# Altium PCB PCB.PcbDoc
Units mm, origin at the board's own origin, x right, y up, seen from the top; angles counter-clockwise.
Board outline 26.67 x 49.53 mm, 2 copper layers (Top Layer, Bottom Layer), stack 1.271 mm thick; 65 components, 45 nets, 214 pads, 69 vias.
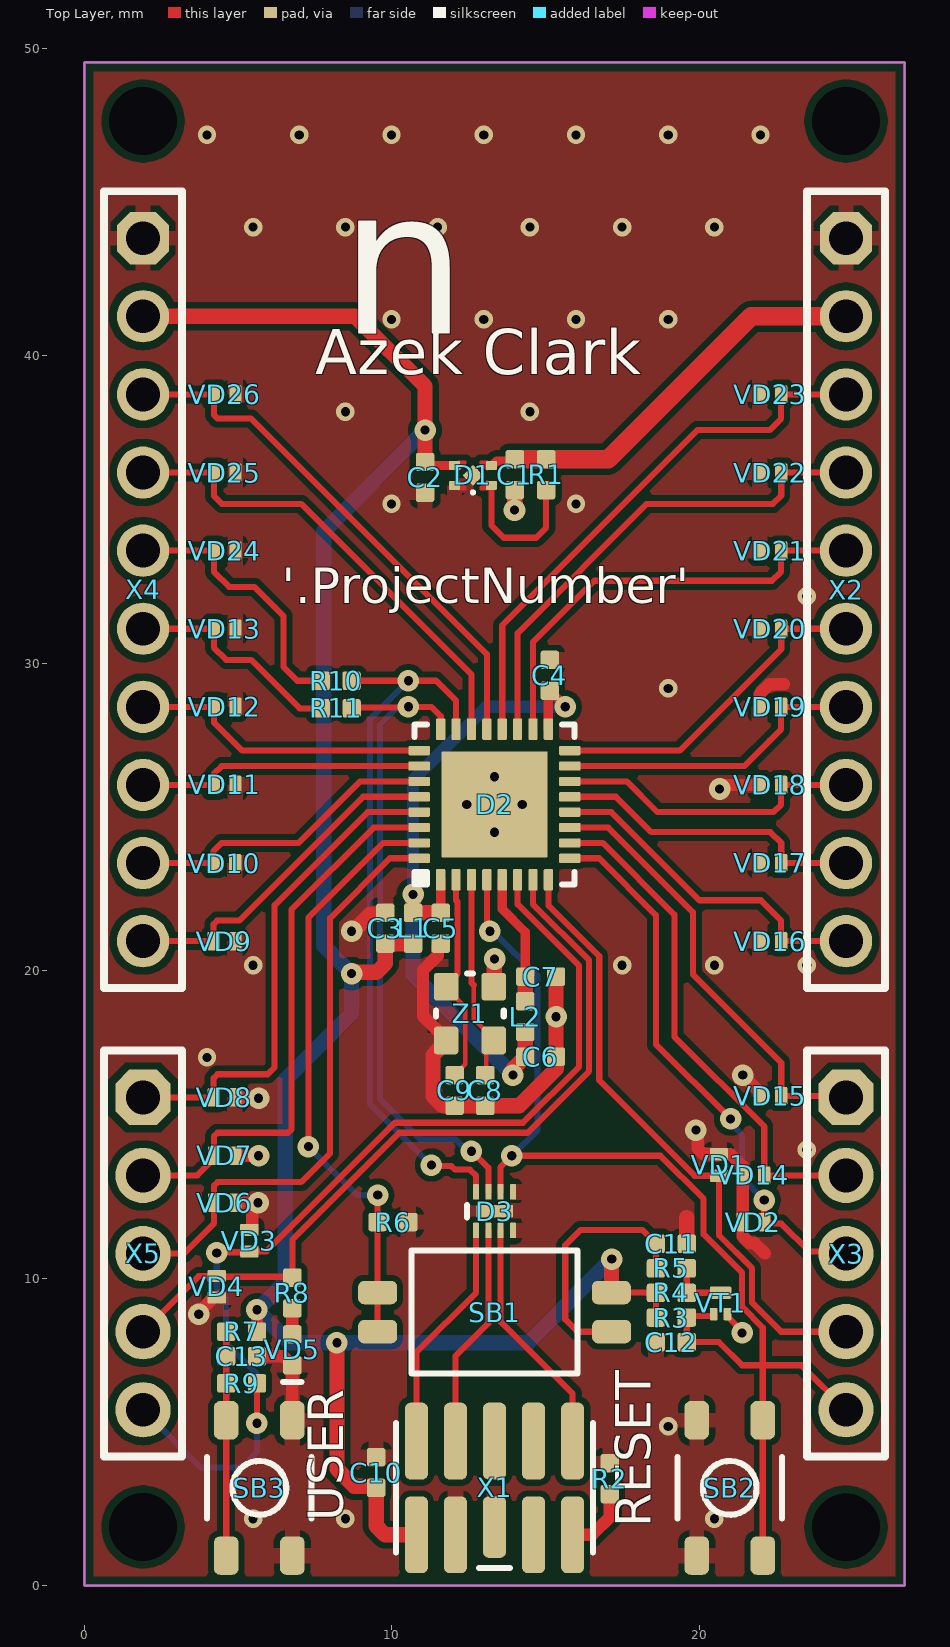
[diagram p0: Top Layer view]
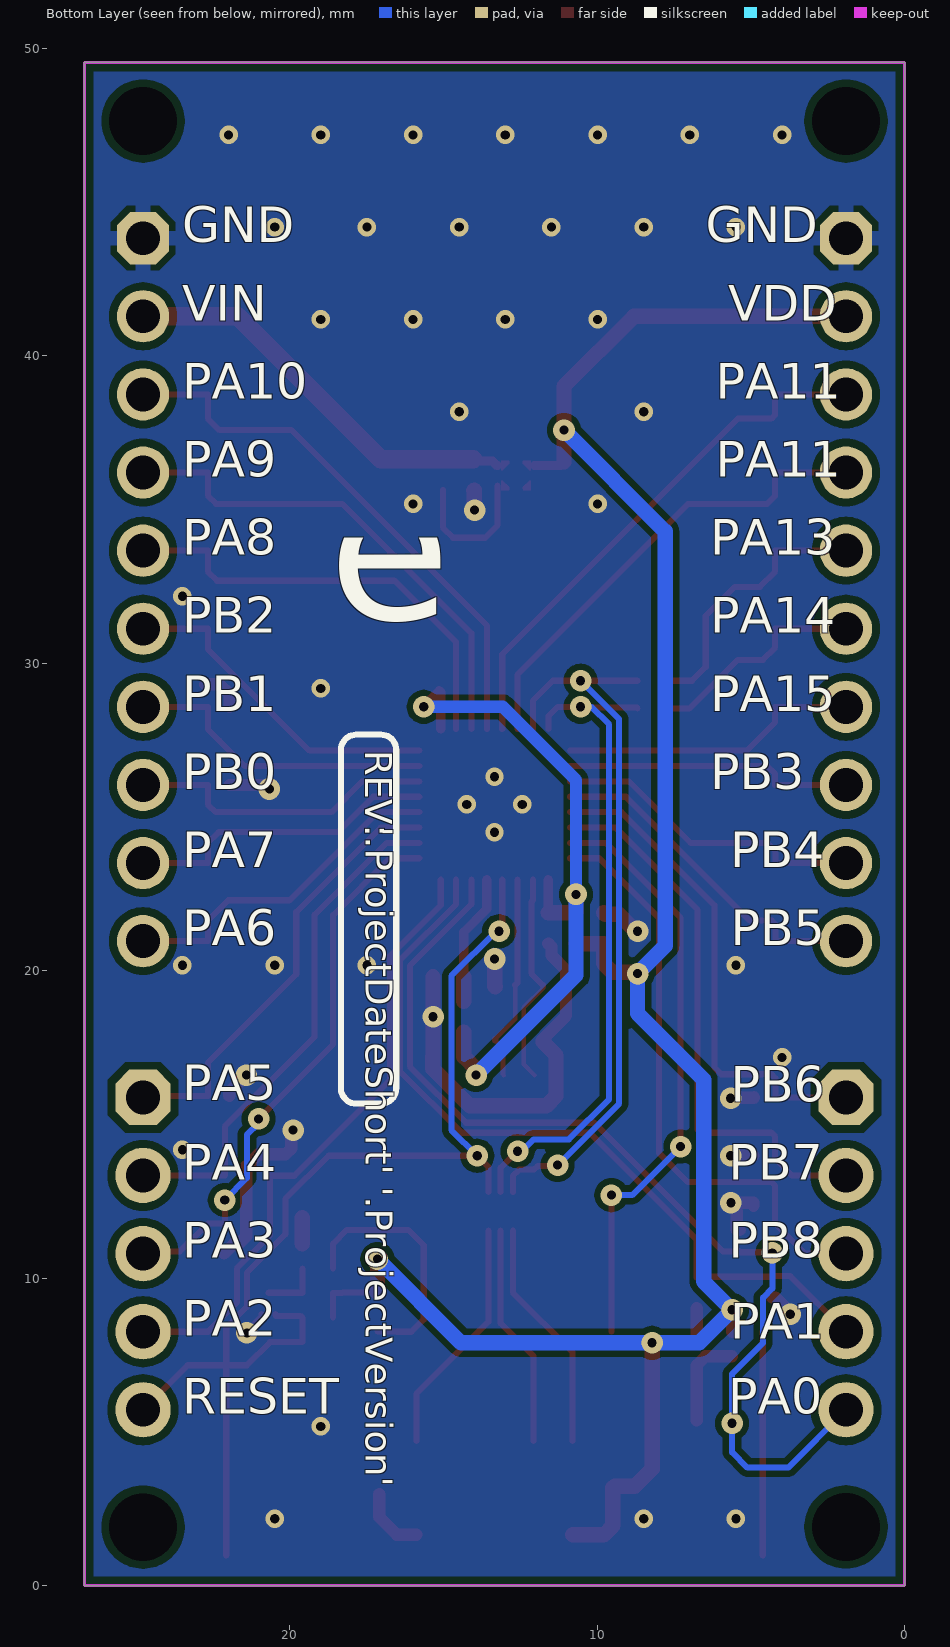
[diagram p1: Bottom Layer view, seen from below]
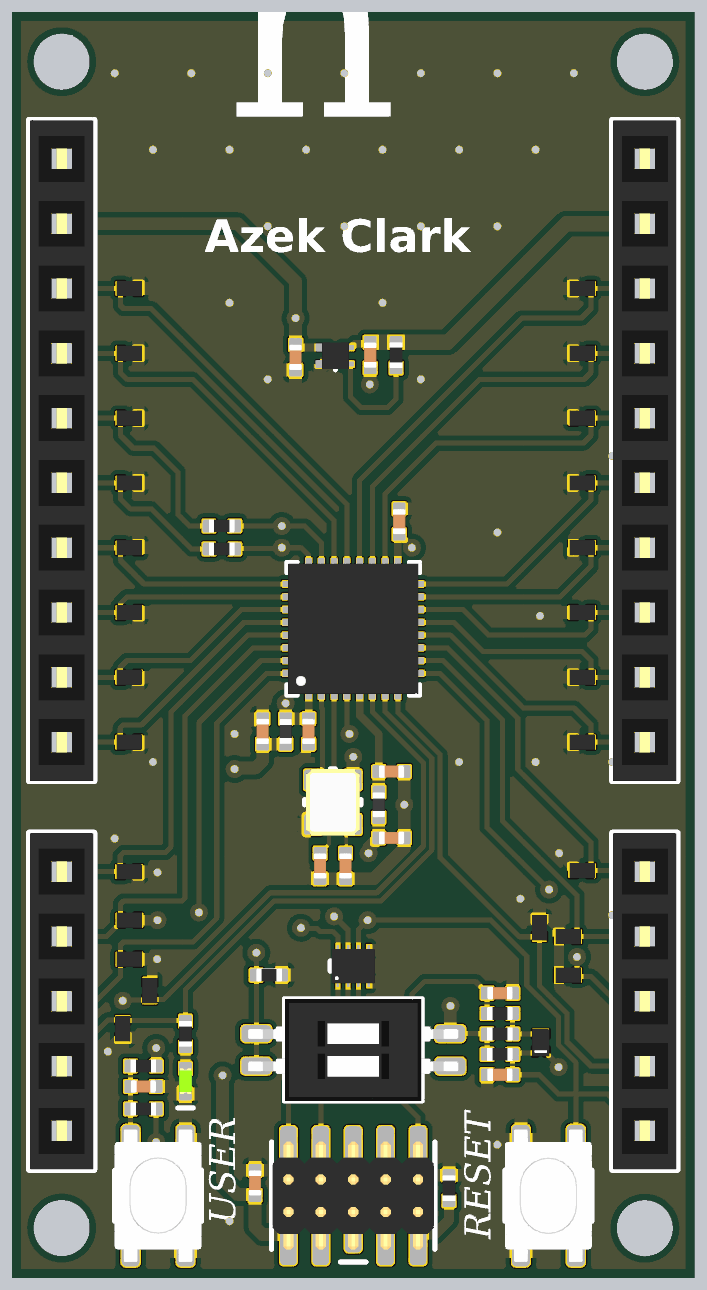
[diagram p2: 3D render of the assembled board from above, using the file's embedded part models]

## Layer stack, top to bottom
Top Solder: solder mask 0.0102, Solder Resist, Dk 3.5
Top Layer: signal copper 0.0356
Dielectric 1: dielectric 1.2, FR-4, Dk 4.8
Bottom Layer: signal copper 0.0356
Bottom Solder: solder mask 0.0102, Solder Resist, Dk 3.5

## Board outline
0,0 0,49.53 26.67,49.53 26.67,0

## Design rules (kind name [scope] priority, off if disabled: settings)
AcuteAngle [All] p1: minimum=4.50000000000000E+0001 checktracksonly=TRUE
BoardOutlineClearance [All] p1: gap=0.3 ignorepadtopadclearanceinfootprint=FALSE
Clearance Clearance_NPTH [All vs InPadClass('NPTH')] p1: gap=0.4 ignorepadtopadclearanceinfootprint=FALSE except(0: Arc-Hole Track-Hole SMDPad-Hole THPad-Hole Via-Hole Fill-Hole Poly-Hole Region-Hole Text-Hole)
Clearance Clearance_MultiLayerPad [OnLayer('Multi-Layer') and IsPad] p2: gap=0.25 ignorepadtopadclearanceinfootprint=FALSE except(0: Arc-Hole Track-Hole SMDPad-Hole THPad-Hole Via-Hole Fill-Hole Poly-Hole Region-Hole Text-Hole)
Clearance Clearance_Polygon [InPolygon] p3: gap=0.2 ignorepadtopadclearanceinfootprint=FALSE except(0: Arc-Hole Track-Hole SMDPad-Hole THPad-Hole Via-Hole Fill-Hole Poly-Hole Region-Hole Text-Hole)
Clearance [All] p4: gap=0.15 ignorepadtopadclearanceinfootprint=FALSE except(0: Arc-Hole Track-Hole SMDPad-Hole THPad-Hole Via-Hole Fill-Hole Poly-Hole Region-Hole Text-Hole; 0.127: Arc-Arc Arc-Track Track-Track)
ComponentClearance [All] p1: gap=0.254 collisioncheckmode=3 verticalgap=0.2 showdistances=FALSE
DiffPairsRouting [All] p1: maxlimit=0.254 minlimit=0.2 mostfreqgap=0.254 toplayer_minwidth=0.2 toplayer_maxwidth=0.5 toplayer_prefwidth=0.3 bottomlayer_minwidth=0.2 bottomlayer_maxwidth=0.5 bottomlayer_prefwidth=0.3 maxuncoupledlength=12.7
Height [All] p1: minheight=0 maxheight=60 prefheight=12.7
HoleSize [All] p1: absolutevalues=TRUE maxlimit=6.3 minlimit=0.3 maxpercent=80.000 minpercent=20.000
HoleToHoleClearance [All] p1: gap=0.5 allowstackedmicrovias=TRUE
MinimumAnnularRing [All] p1: minimumring=0.13
MinimumSolderMaskSliver [All] p1: minsoldermaskwidth=0.05
PasteMaskExpansion [All] p1: expansion=-0.05
PlaneClearance [All] p1: clearance=0.5
PlaneConnect [All] p1: planeconnectstyle=Relief reliefexpansion=0.5 reliefentries=4 reliefconductorwidth=0.3 reliefairgap=0.2
PolygonConnect PolygonConnect_PowerPAD [All vs InPadClass('PowerPAD')] p1: connectstyle=Relief reliefconductorwidth=1 reliefentries=4 polygonreliefangle="90 Angle" airgapwidth=0.3
PolygonConnect PolygonConnect_PadGND [InNet('GND') and IsPad] p2: connectstyle=Relief reliefconductorwidth=0.5 reliefentries=4 polygonreliefangle="90 Angle" airgapwidth=0.2
PolygonConnect PolygonConnect_Via [IsVia] p3: connectstyle=Direct reliefconductorwidth=0.254 reliefentries=4 polygonreliefangle="90 Angle" airgapwidth=0.254
PolygonConnect [All] p4: connectstyle=Relief reliefconductorwidth=0.6 reliefentries=4 polygonreliefangle="90 Angle" airgapwidth=0.3
RoomDefinition GPIO-Debug [InComponentClass('GPIO-Debug')] p1: confinementstyle=ConfineIn formatcopy=TRUE lockcomponents=FALSE outline 9.289,27.921 7.081,27.921 7.081,30.029 9.289,30.029
RoomDefinition LED&Button [InComponentClass('LED&Button')] p2: confinementstyle=ConfineIn formatcopy=TRUE lockcomponents=FALSE outline 3.631,0.046 3.631,6.304 4.006,6.304 4.006,8.859 6.156,8.859 6.156,10.619 7.364,10.619 7.364,8.769 7.414,8.769 7.414,6.304 7.739,6.304 7.739,0.046
RoomDefinition MCU-Power [InComponentClass('MCU-Power')] p3: confinementstyle=ConfineIn formatcopy=TRUE lockcomponents=FALSE outline 13.639,14.996 11.431,14.996 11.431,16.971 11.056,16.971 11.056,20.396 9.431,20.396 9.431,22.604 10.231,22.604 10.231,28.504 14.531,28.504 14.531,30.704 15.739,30.704 15.739,28.504 16.439,28.504 16.439,22.296 15.939,22.296 15.939,16.596 13.639,16.596
RoomDefinition PowerSupply [InComponentClass('PowerSupply')] p4: confinementstyle=ConfineIn formatcopy=TRUE lockcomponents=FALSE outline 10.472,34.933 10.472,37.141 14.601,37.141 14.601,37.133 15.617,37.133 15.617,34.925 14.409,34.925 14.409,34.933
RoomDefinition MCU-Debug [InComponentClass('MCU-Debug')] p5: confinementstyle=ConfineIn formatcopy=TRUE lockcomponents=FALSE outline 8.596,6.536 8.596,11.244 8.931,11.244 8.931,12.425 12.081,12.425 12.081,13.625 14.489,13.625 14.489,11.719 20.189,11.719 20.189,10.129 21.439,10.129 21.439,6.304 23.039,6.304 23.039,0.046 18.931,0.046 18.931,0.097 9.781,0.097 9.781,2.571 8.881,2.571 8.881,6.536
RoomDefinition Connector-side-2 [InComponentClass('Connector-side-2')] p6: confinementstyle=ConfineIn formatcopy=TRUE lockcomponents=FALSE outline 0.185,3.775 5.985,3.775 5.985,45.775 0.185,45.775
RoomDefinition Connector-side-1 [InComponentClass('Connector-side-1')] p7: confinementstyle=ConfineIn formatcopy=TRUE lockcomponents=FALSE outline 20.031,12.821 20.031,14.529 21.452,14.529 21.452,39.339 23.114,39.339 23.114,45.72 26.416,45.72 26.416,17.776 26.416,3.814 23.114,3.814 23.114,11.217 20.901,11.217 20.901,12.821
RoutingVias [All] p1: holewidth=0.3 width=0.7 viastyle="Through Hole" minholewidth=0.3 minwidth=0.6 maxholewidth=0.5 maxwidth=1.2
SilkToSilkClearance [All] p1: silktosilkclearance=0
SilkToSolderMaskClearance [IsPad] p1: minsilkscreentomaskgap=0.15 clearancetoexposedcopper=TRUE
SolderMaskExpansion SolderMaskExpansion_VIa [isVia] p1: expansion=0.102 istentingtop=TRUE
SolderMaskExpansion [All] p2: expansion=0.05 istentingtop=FALSE
UnRoutedNet [All] p1: checkbadconnections=TRUE
Width [All] p1: maxlimit=10 minlimit=0.127 preferedwidth=0.2
18 further rules are at their usual default settings.

## Classes and differential pairs
component class GPIO-Debug: R10 R11
component class PowerSupply: C1 C2 D1 R1
component class MCU-Power: C3 C4 C5 C6 C7 C8 C9 D2 L1 L2 Z1
component class MCU-Debug: C10 C11 C12 D3 R2 R3 R4 R5 R6 SB1 SB2 VT1 X1
component class LED&Button: C13 R7 R8 R9 SB3 VD5
component class Connector-side-2: VD3 VD4 VD6 VD7 VD8 VD9 VD10 VD11 VD12 VD13 VD24 VD25 VD26 X4 X5
component class Connector-side-1: VD1 VD2 VD14 VD15 VD16 VD17 VD18 VD19 VD20 VD21 VD22 VD23 X2 X3

## Components (designator, comment, footprint, x,y, rotation, side; value= is the part's Value field where it differs from the comment)
C1 "1µF" CH0402C 13.997,36.125 r90 top
C2 "1µF" CH0402C 11.076,36.037 r90 top
C3 "4.7µF" CH0402C 9.785,21.375 r270 top
C4 "100nF" CH0402C 15.135,29.6 r270 top
C5 "100nF" CH0402C 11.585,21.375 r90 top
C6 "1µF" CH0402C 14.835,17.2 r180 top
C7 "100nF" CH0402C 14.835,19.8 r180 top
C8 "8pF" CH0402C 13.035,16.1 r90 top
C9 "8pF" CH0402C 12.035,16.1 r90 top
C10 "100nF" CH0402C 9.485,3.675 r270 top
C11 "2.2µF" CH0402C 19.085,11.115 r180 top
C12 "100nF" CH0402C 19.085,7.915 r0 top
C13 "100nF" CH0402C 5.11,7.457 r180 top
D1 "WL2815D33-4/TR" DFN1010-4 12.635,36.1 r90 top
D2 "STM32F031KxU6" 32-UFQFPN 13.335,25.4 r90 top
D3 "TPD4F003DQD" "8-WSON (1.7x1.35 mm)" 13.335,12.175 r0 top
L1 "120Ω @ 100MHz" CH0402L 10.685,21.375 r270 top
L2 "120Ω @ 100MHz" CH0402L 14.335,18.5 r270 top
R1 "100k" CH0402R 15.013,36.125 r90 top
R2 "900k" CH0402R 17.085,3.475 r270 top
R3 "100k" CH0402R 19.085,8.715 r180 top
R4 "1M" CH0402R 19.085,9.515 r180 top
R5 "10k" CH0402R 19.085,10.315 r180 top
R6 "100k" CH0402R 10.035,11.821 r180 top
R7 "100k" CH0402R 5.11,8.255 r0 top
R8 "150" CH0402R 6.76,9.515 r90 top
R9 "0" CH0402R 5.11,6.575 r180 top
R10 "0" CH0402R 8.185,29.425 r180 top
R11 "0" CH0402R 8.185,28.525 r180 top
SB1 "*" "BUT: DSHP02TS" 13.335,8.89 r90 top
SB2 "\"Кнопка\"" "BUT: YTS-A017" 20.985,3.175 r90 top
SB3 "\"Кнопка\"" "BUT: YTS-A017" 5.685,3.175 r270 top
VD1 "Rclamp3311P-N" DFN1006-2 20.635,13.675 r90 top
VD2 "Rclamp3311P-N" DFN1006-2 21.755,11.821 r180 top
VD3 "Rclamp3311P-N" DFN1006-2 5.36,11.215 r90 top
VD4 "Rclamp3311P-N" DFN1006-2 4.3,9.715 r270 top
VD5 "Blue" CH0402LG 6.76,7.665 r90 top
VD6 "Rclamp3311P-N" DFN1006-2 4.56,12.446 r0 top
VD7 "Rclamp3311P-N" DFN1006-2 4.56,13.975 r0 top
VD8 "Rclamp3311P-N" DFN1006-2 4.55,15.875 r0 top
VD9 "Rclamp3311P-N" DFN1006-2 4.55,20.955 r0 top
VD10 "Rclamp3311P-N" DFN1006-2 4.55,23.495 r0 top
VD11 "Rclamp3311P-N" DFN1006-2 4.56,26.035 r0 top
VD12 "Rclamp3311P-N" DFN1006-2 4.56,28.575 r0 top
VD13 "Rclamp3311P-N" DFN1006-2 4.56,31.115 r0 top
VD14 "Rclamp3311P-N" DFN1006-2 21.755,13.335 r180 top
VD15 "Rclamp3311P-N" DFN1006-2 22.307,15.918 r180 top
VD16 "Rclamp3311P-N" DFN1006-2 22.306,20.955 r180 top
VD17 "Rclamp3311P-N" DFN1006-2 22.307,23.495 r180 top
VD18 "Rclamp3311P-N" DFN1006-2 22.306,26.035 r180 top
VD19 "Rclamp3311P-N" DFN1006-2 22.306,28.575 r180 top
VD20 "Rclamp3311P-N" DFN1006-2 22.306,31.115 r180 top
VD21 "Rclamp3311P-N" DFN1006-2 22.307,33.655 r180 top
VD22 "Rclamp3311P-N" DFN1006-2 22.307,36.195 r180 top
VD23 "Rclamp3311P-N" DFN1006-2 22.306,38.735 r180 top
VD24 "Rclamp3311P-N" DFN1006-2 4.56,33.655 r0 top
VD25 "Rclamp3311P-N" DFN1006-2 4.56,36.195 r0 top
VD26 "Rclamp3311P-N" DFN1006-2 4.56,38.735 r0 top
VT1 "TPM2008P3" DFN1006-3L 20.685,9.175 r90 top
X1 "PLLD1.27-10" "CON: PLLD-1.27-10" 13.335,3.175 r0 top
X2 "PBSL-10" "CON: PBSL-10" 24.765,32.385 r270 top
X3 "PBSL-5" "CON: PBSL-5" 24.765,10.795 r270 top
X4 "PBSL-10" "CON: PBSL-10" 1.905,32.385 r270 top
X5 "PBSL-5" "CON: PBSL-5" 1.905,10.795 r270 top
Z1 "16MHz" "OSC: 2520" 12.535,18.6 r90 top

## Footprints (in the part's own frame and the unit in brackets; to place one, negate y for a bottom-side part, rotate by r counter-clockwise, add the part's x,y. Pads: shape width x height; smd on the part's side, far side on the other; paste and mask are expansions set on the pad)
"8-WSON (1.7x1.35 mm)" [mm]
  rrect12% 1.2x0.4 smd paste-5: 0(0,0)
  rrect25% 0.2x0.5 smd: 1(-0.6,-0.625) 2(-0.2,-0.625) 3(0.2,-0.625) 4(0.6,-0.625) 5(0.6,0.625) 6(0.2,0.625) 7(-0.2,0.625) 8(-0.6,0.625)
  silkscreen extent -0.9,-0.2 -0.9,0.2, body extent -0.85,-0.68 0.85,0.68, height 0.8
32-UFQFPN [mm] "32-lead, 5 x 5 mm, 0.5 mm pitch"
  rrect2% 3.45x3.45 smd paste-5: 0(0,0)
  rrect25% 0.7x0.3 smd paste-0.025: 1(-2.45,1.75) 2(-2.45,1.25) 3(-2.45,0.75) 4(-2.45,0.25) 5(-2.45,-0.25) 6(-2.45,-0.75) 7(-2.45,-1.25) 8(-2.45,-1.75) 17(2.45,-1.75) 18(2.45,-1.25) 19(2.45,-0.75) 20(2.45,-0.25) 21(2.45,0.25) 22(2.45,0.75) 23(2.45,1.25) 24(2.45,1.75)
  rrect25% 0.3x0.7 smd paste-0.025: 9(-1.75,-2.45) 10(-1.25,-2.45) 11(-0.75,-2.45) 12(-0.25,-2.45) 13(0.25,-2.45) 14(0.75,-2.45) 15(1.25,-2.45) 16(1.75,-2.45) 25(1.75,2.45) 26(1.25,2.45) 27(0.75,2.45) 28(0.25,2.45) 29(-0.25,2.45) 30(-0.75,2.45) 31(-1.25,2.45) 32(-1.75,2.45)
  silkscreen extent -2.6,-2.6 2.6,2.6, body extent -2.56,-2.56 2.56,2.56, height 0.6
"BUT: DSHP02TS" [mm] "Switches array 2-bit, 1.27 pitch"
  rrect50% 0.76x1.27 smd: 1(-0.634,-3.81) 2(0.636,-3.8) 3(0.636,3.8) 4(-0.634,3.8)
  silkscreen extent -2,-2.7 2,2.7, body extent -1.99,-4.12 2,4.13, height 2.55
"BUT: YTS-A017" [mm] "Tactile button 5.2x3.4x2.5 SMD"
  rrect50% 1.25x0.8 smd: 1(-2.2,1.075) 1(2.2,1.075) 2(-2.2,-1.075) 2(2.2,-1.075)
  silkscreen extent -1,-1.7 1,1.7, body extent -2.6,-1.7 2.6,1.7, height 2.5
CH0402C [mm]
  rrect25% 0.6x0.6 smd: 1(-0.5,0) 2(0.5,0)
  body extent -0.5,-0.25 0.5,0.25, height 0.5
CH0402L [mm]
  rrect25% 0.6x0.6 smd: 1(-0.5,0) 2(0.5,0)
  body extent -0.5,-0.25 0.5,0.25, height 0.5
CH0402LG [mm]
  rrect25% 0.6x0.6 smd: 1(0.5,0) 2(-0.5,0)
  silkscreen extent -1.05,-0.3 -1.05,0.3, body extent -0.5,-0.25 0.5,0.25, height 0.4
CH0402R [mm]
  rrect25% 0.6x0.6 smd: 1(-0.5,0) 2(0.5,0)
  body extent -0.5,-0.25 0.5,0.26, height 0.33
"CON: PBSL-5" [mm] "Female header 2.54mm pitch, pin length 11mm"
  oct 1.8x1.8 hole 1.1: 1(-5.08,0)
  round 1.8 hole 1.1: 2(-2.54,0) 3(0,0) 4(2.54,0) 5(5.08,0)
  silkscreen extent -6.6,-1.27 6.6,1.27, body extent -6.6,-1.25 6.6,1.25, height 8.5
"CON: PBSL-10" [mm] "Female header 2.54mm pitch, pin lengh 11mm"
  oct 1.7x1.7 hole 1.1: 1(-11.43,0)
  round 1.7 hole 1.1: 2(-8.89,0) 3(-6.35,0) 4(-3.81,0) 5(-1.27,0) 6(1.27,0) 7(3.81,0) 8(6.35,0) 9(8.89,0) 10(11.43,0)
  silkscreen extent -12.95,-1.27 12.95,1.27, body extent -12.95,-1.25 12.95,1.25, height 8.5
"CON: PLLD-1.27-10" [mm] "Male header 1.27mm pitch. smt version"
  rrect50% 0.75x2.5 smd: 1(-2.54,-1.524) 2(-2.54,1.524) 3(-1.27,-1.524) 4(-1.27,1.524) 6(0,1.524) 7(1.27,-1.524) 8(1.27,1.524) 9(2.54,-1.524) 10(2.54,1.524)
  rrect50% 0.75x2 smd: 5(0,-1.275)
  silkscreen extent -3.2,-2.6 3.2,2.1, body extent -3.17,-2.12 3.17,2.11, height 5.9
DFN1006-2 [mm] "2-Leads, Body 1.0x0.6mm (max), Pitch 0,65mm"
  rrect25% 0.4x0.6 smd: 1(0.35,0) 2(-0.35,0)
  body extent -0.5,-0.3 0.5,0.3, height 0.6
DFN1006-3L [mm] "3-Leads, Body 1.0x0.6mm (max), Pitch 0,35mm"
  rrect25% 0.4x0.25 smd: 1(-0.35,0.225) 3(-0.35,-0.225)
  rrect25% 0.4x0.7 smd: 2(0.35,0)
  body extent -0.54,-0.34 0.54,0.34, height 0.54
DFN1010-4 [mm] "4-Leads, Body 1.0x1.0mm (max), Pitch 0,65mm"
  rrect12% 0.48x0.48 smd rot 45 paste+0: 0(0,0)
  rrect25% 0.3x0.35 smd paste+0: 1(-0.325,0.6) 2(0.325,0.6)
  rrect25% 0.3x0.35 smd: 3(0.325,-0.6) 4(-0.325,-0.6)
  Top Layer region: 0.475,-0.475 0.475,-0.25 0.473,-0.24 0.468,-0.232 0.46,-0.227 0.45,-0.225 0.45,-0.225 0.375,-0.225 0.175,-0.425 0.175,-0.475
  Top Layer region: -0.475,-0.475 -0.475,-0.25 -0.473,-0.24 -0.468,-0.232 -0.46,-0.227 -0.45,-0.225 -0.45,-0.225 -0.375,-0.225 -0.175,-0.425 -0.175,-0.475
  Top Layer region: 0.475,0.475 0.475,0.25 0.473,0.24 0.468,0.232 0.46,0.227 0.45,0.225 0.45,0.225 0.375,0.225 0.175,0.425 0.175,0.475
  Top Layer region: -0.475,0.475 -0.475,0.25 -0.473,0.24 -0.468,0.232 -0.46,0.227 -0.45,0.225 -0.45,0.225 -0.375,0.225 -0.175,0.425 -0.175,0.475
  silkscreen extent -0.57,-0.03 -0.53,0.02, body extent -0.52,-0.52 0.53,0.53, height 0.4
"OSC: 2520" [mm]
  rrect25% 0.9x0.8 smd: 1(-0.875,-0.775) 2(0.875,-0.775) 3(0.875,0.775) 4(-0.875,0.775)
  silkscreen extent -0.1,-1.1 1.3,1.1, body extent -1.3,-1.05 1.3,1.05, height 0.55

## Part data
C1 C2 C3 C4 C5 C6 C7 C8 C9 C10 C11 C12 C13: library part Capacitor
D1: library part WL2815, "LDO", ComponentKind="DFN1010-4, 5.25V, 300mA", HelpURL=https://www.lcsc.com/product-detail/Linear-Voltage-Regulators-LDO_WILLSEMI-Will-Semicon-WL2815D33-4-TR_C506126.html, Model=WL2815D33-4/TR
D2: "STM32, Cortex-M0", Manufacturer="ST Microelectronics", ComponentKind="STM32, 2.0-3.6V, 32-UFQFPN", HelpURL=https://lcsc.com/product-detail/ST-Microelectronics_STMicroelectronics-STM32F031K6U6_C97412.html, Model=STM32F031KxU6
D3: library part TPD4F003, "4-bit IO protection", Manufacturer="Texas Instruments", ComponentKind="EMI Filter With Integrated ESD Protection", HelpURL=https://www.chipdip.ru/product1/8002950921, Model=TPD4F003DQD
L1 L2: library part Inductor
R1 R2 R3 R4 R5 R6 R7 R8 R9 R10 R11: library part Resistor
SB1: library part 2(1)-Switch, "2 Array, latching"
SB2 SB3: library part 1-Button, "Button, no latching"
VD1 VD2 VD3 VD4 VD6 VD7 VD8 VD9 VD10 VD11 VD12 VD13 VD14 VD15 VD16 VD17 VD18 VD19 VD20 VD21 VD22 VD23 VD24 VD25 VD26: library part TVS-diod, Manufacturer=BORN, ComponentKind="3.3V, 8V. 10A", HelpURL=https://www.lcsc.com/product-detail/ESD-Protection-Devices_BORN-Rclamp3311P-N_C406234.html, Model=Rclamp3311P-N
VD5: library part LED
VT1: library part N-chanel, "Mosfet", Manufacturer="TECH PUBLIC", ComponentKind="20V, 1.1V, 0.7A", HelpURL=https://www.lcsc.com/product-detail/MOSFETs_TECH-PUBLIC-TPM2008P3_C708974.html, Model=TPM2008P3
X1 X2 X4: library part 10-Connector
  X1: Model=PLLD1.27-10
  X2 X4: Model=PBSL-10
X3 X5: library part 5-Connector, Model=PBSL-5
Z1: library part Generator

## Free pads (board coordinates)
  round 0 hole 2.2 unplated paste+0 mask+0.1: 0(1.905,1.905) 0(1.905,47.625) 0(24.765,47.625)
  round 0 hole 2.2 unplated paste+0: 0(24.765,1.9)

## Via types
v1: diameter 0.6, hole 0.3, Top Layer to Bottom Layer, tented both sides, 37 vias
v2: diameter 0.7, hole 0.3, Top Layer to Bottom Layer, tented both sides, 32 vias

## Nets (pads, with @x,y where several pads share a name; then routed paths per layer and width w, separated by ;. In a path a pad name is that pad's centre, name@x,y a point inside that pad or via, vN(x,y) a via of type N, cw(c..) or ccw(c..) an arc to the next point about the centre after c; other vN are vias at no path point)
BOOT0: D2.31 R6.2 SB1.3 SB1.4 | length 19.4
  Top Layer w0.2: v2(7.285,14.275) 7.285,21.717 9.718,24.15 D2.31 ; SB1.4 SB1.3 R6.2 v2(9.535,12.696)
  Bottom Layer w0.2: v2(7.285,14.275) 8.864,12.696 v2(9.535,12.696)
"DB SWCLK/TCLK": D2.24 D3.7 R11.1 | length 22.1
  Top Layer w0.2: R11.1 8.71,28.55 10.51,28.55 v2(10.535,28.575) 11.285,28.575 11.585,28.275 D2.24 ; v2(12.583,14.123) 12.599,14.123 13.135,13.587 D3.7
  Bottom Layer w0.2: v2(10.535,28.575) 10.185,28.575 9.612,28.002 9.612,15.81 10.916,14.506 12.065,14.506 12.448,14.123 v2(12.583,14.123)
"DB SWIO/TMS": D2.23 D3.8 R10.1 | length 23.8
  Top Layer w0.2: R10.1 v2(10.535,29.425) 11.435,29.425 12.085,28.775 D2.23 ; v2(11.285,13.675) 11.317,13.643 11.935,13.643 12.053,13.525 12.535,13.525 12.735,13.325 D3.8
  Bottom Layer w0.2: v2(10.535,29.425) 9.285,28.175 9.285,15.675 v2(11.285,13.675)
DB_NRESET_IN: D3.3 X1.10 | length 7.8
  Top Layer w0.2: D3.3 13.535,8.577 15.875,6.237 X1.10
DB_SWCLK/TCLK_IN: D3.2 X1.4 | length 7.3
  Top Layer w0.2: X1.4 12.065,7.457 13.135,8.527 D3.2
DB_SWIO/TMS_IN: D3.1 X1.2 | length 7.7
  Top Layer w0.2: X1.2 10.795,7.586 12.735,9.526 D3.1
GND: C1.1 C2.1 C3.1 C4.1 C5.1 C6.1 C7.1 C8.1 C9.1 C10.1 C11.1 C12.1 C13.1 D1.0 D1.1 D2.0 D3.0 D3.4 D3.5 R2.1 R6.1 SB2.1 SB3.1 VD1.1 VD2.1 VD3.1 VD4.1 VD5.2 VD6.1 VD7.1 VD8.1 VD9.1 VD10.1 VD11.1 VD12.1 VD13.1 VD14.1 VD15.1 VD16.1 VD17.1 VD18.1 VD19.1 VD20.1 VD21.1 VD22.1 VD23.1 VD24.1 VD25.1 VD26.1 VT1.3 X1.3 X1.5 X2.1 X4.1 Z1.2 Z1.4 | length 34.5
  Top Layer w0.2: VT1.3 20.91,8.75 21.385,8.275 v2(21.385,8.215)
  Top Layer w0.4: v2(3.715,8.825) 3.715,8.88 4.2,9.365 VD4.1 ; VD8.1 4.9,15.863 5.648,15.863 v2(5.66,15.85) ; VD6.1@4.91,12.346 VD6.1 v2(5.648,12.446) 5.648,12.365 5.46,12.177 5.46,11.565 VD3.1 ; VD7.1 v2(5.66,13.975) ; C13.1 6.468,7.457 VD5.2 SB3.1@6.76,5.375 ; C5.1 11.485,20.775 11.485,20.486 11.01,20.011 11.01,18.525 11.76,17.775 Z1.4 ; v2(19.885,14.812) 19.942,14.755 19.942,14.218 20.135,14.025 VD1.1 21.01,14.025 21.405,13.63 VD14.1 VD2.1 21.405,11.362 21.639,11.128 21.8,11.128 22.133,10.795 ; v2(20.656,25.903) 20.656,26.035 VD18.1 ; v2(21.405,16.6) 21.957,16.048 VD15.1 ; VD19.1 21.956,28.991 22.277,29.312 22.75,29.312
  Top Layer w0.5: v2(8.685,21.275) 8.739,21.275 9.289,21.825 9.735,21.825 C3.1 ; Z1.4 11.76,17.675 11.335,17.25 11.335,15.918 11.653,15.6 C9.1 C8.1 14.135,15.6 15.34,16.804 15.34,17.195 C6.1 v2(15.335,18.5) C7.1 ; Z1.2 13.323,19.488 13.323,20.363 v2(13.335,20.375) ; v2(13.985,34.975) 13.991,34.981 13.991,35.619 C1.1 C1.1@14.015,35.607 ; C11.1 19.585,11.958 19.59,11.958
  other v1: 5.485,2.175 8.485,2.175 20.485,2.175 18.985,5.175 23.485,14.175 3.985,17.175 5.485,20.175 17.485,20.175 20.485,20.175 23.485,20.175 13.335,24.5 12.435,25.4 14.235,25.4 13.335,26.3 18.985,29.175 23.485,32.175 9.985,35.175 15.985,35.175 8.485,38.175 14.485,38.175 9.985,41.175 12.985,41.175 15.985,41.175 18.985,41.175 5.485,44.175 8.485,44.175 11.485,44.175 14.485,44.175 17.485,44.175 20.485,44.175 3.985,47.175 6.985,47.175 9.985,47.175 12.985,47.175 15.985,47.175 18.985,47.175 21.985,47.175
NetC7_2: C7.2 D2.5 L2.1 | length 4.3
  Top Layer w0.3: D2.5 13.585,22 14.335,21.25 C7.2
  Top Layer w0.5: L2.1 C7.2
NetC8_2: C8.2 D2.3 Z1.1 | length 6.8
  Top Layer w0.15: 12.66,19.525 12.66,18.425 Z1.1@13.31,17.775 ; C8.2 13.06,16.625 13.06,17.475 Z1.1
  Top Layer w0.2: D2.3 12.585,19.6 12.66,19.525 ; Z1.1 Z1.1@13.31,17.775
NetC9_2: C9.2 D2.2 Z1.3 | length 6.9
  Top Layer w0.15: Z1.3 11.76,19.425 12.383,18.802 12.383,18.31 12.385,18.308 12.385,16.95 C9.2
  Top Layer w0.2: Z1.3 11.76,19.525 12.135,19.9 12.135,22.235 12.085,22.285 D2.2
NetC11_2: C11.2 R5.2 SB1.1 | length 8.2
  Top Layer w0.2: 16.509,8.255 16.035,8.255 15.635,8.655 15.635,11.065 16.135,11.565 18.135,11.565 C11.2 R5.2 ; 16.51,8.256 SB1.1
NetD1_4: D1.4 R1.1 | length 4.6
  Top Layer w0.2: D1.4 13.235,34.475 13.635,34.075 14.685,34.075 15.013,34.403 R1.1
NetR2_2: R2.2 X1.9 | length 2.2
  Top Layer w0.4: X1.9 16.51,1.651 17.085,2.226 R2.2
NetR4_1: R4.1 R5.1 VT1.2 | length 1.9
  Top Layer w0.2: R5.1 R4.1 19.59,9.52 20.68,9.52 VT1.2
NetR8_1: R8.1 VD5.1 | length 0.8
  Top Layer w0.4: VD5.1 R8.1
PA0: D2.6 R9.1 VD3.2 X5.5 | length 34.2
  Top Layer w0.2: v2(4.3,10.815) 4.325,10.84 5.335,10.84 VD3.2 5.91,10.865 10.095,15.05 14.26,15.05 16.085,16.875 16.085,20.15 14.085,22.15 D2.6 ; v2(5.61,5.275) R9.1
  Bottom Layer w0.2: X5.5 3.785,3.835 5.11,3.835 5.61,4.335 v2(5.61,5.275) 5.61,6.883 4.6,7.893 4.6,9.365 4.3,9.665 v2(4.3,10.815)
PA1: D2.7 R8.2 VD4.2 X5.4 | length 25.8
  Top Layer w0.2: X5.4 3.715,10.065 VD4.2 4.325,10.04 6.735,10.04 R8.2 6.76,11.253 10.23,14.723 14.408,14.723 16.412,16.727 16.412,20.333 14.585,22.16 D2.7
PA2: D2.8 VD1.2 X3.4 | length 20.4
  Top Layer w0.2: D2.8 15.085,22.123 16.739,20.469 16.739,16.429 19.843,13.325 VD1.2 20.635,11.387 21.712,10.31 21.712,9.2 ; 21.712,9.199 22.656,8.255 X3.4
PA3: D2.9 VD2.2 X3.3 | length 18.1
  Top Layer w0.2: D2.9 16.739,23.65 18.585,21.804 18.585,17.6 v2(21.01,15.175) ; v2(22.105,12.535) VD2.2 22.155,11.771 22.657,11.771 23.565,10.863 24.697,10.863 X3.3
  Bottom Layer w0.2: v2(21.01,15.175) 21.01,15.04 21.385,14.665 21.385,13.255 v2(22.105,12.535)
PA4: D2.10 VD14.2 X3.2 | length 16.7
  Top Layer w0.2: D2.10 16.848,24.15 19.185,21.813 19.185,17.849 22.105,14.929 VD14.2 X3.2
PA5: D2.11 VD15.2 X3.1 | length 14.4
  Top Layer w0.2: D2.11 17.033,24.65 19.785,21.898 19.785,19.875 22.657,17.003 VD15.2 24.722,15.918 X3.1
PA6: D2.12 VD16.2 X2.10 | length 11.1
  Top Layer w0.2: D2.12 17.135,25.15 20,22.285 21.996,22.285 22.656,21.625 VD16.2 X2.10
PA7: D2.13 VD17.2 X2.9 | length 10.3
  Top Layer w0.2: D2.13 17.285,25.65 18.435,24.5 22.306,24.5 22.657,24.149 VD17.2 X2.9
PA8: D2.18 VD21.2 X2.5 | length 14.6
  Top Layer w0.2: D2.18 14.585,30.675 16.585,32.675 22.356,32.675 22.656,32.975 22.656,33.654 VD21.2 X2.5
PA9: D2.19 VD22.2 X2.4 | length 16.4
  Top Layer w0.2: D2.19 14.085,30.975 18.285,35.175 22.385,35.175 22.657,35.447 VD22.2 X2.4
PA10: D2.20 VD23.2 X2.3 | length 18.1
  Top Layer w0.2: D2.20 13.585,31.225 19.935,37.575 22.281,37.575 22.656,37.95 VD23.2 X2.3
PA11: D2.21 VD26.2 X4.3 | length 17.5
  Top Layer w0.2: X4.3 VD26.2 4.21,38.067 4.327,37.95 5.418,37.95 13.085,30.283 D2.21
PA12: D2.22 VD25.2 X4.4 | length 15.6
  Top Layer w0.2: X4.4 VD25.2 4.21,35.437 4.472,35.175 7.042,35.175 12.585,29.632 D2.22
PA13: R10.2 VD24.2 X4.5 | length 8.9
  Top Layer w0.2: X4.5 VD24.2 4.21,32.975 4.71,32.475 5.525,32.475 6.468,31.532 6.468,29.875 6.918,29.425 R10.2
PA14: R11.2 VD13.2 X4.6 | length 7.2
  Top Layer w0.2: X4.6 VD13.2 4.21,30.5 4.61,30.1 5.418,30.1 6.993,28.525 R11.2
PA15: D2.25 VD12.2 X4.7 | length 9.9
  Top Layer w0.2: X4.7 VD12.2 4.21,28.075 5.135,27.15 D2.25
PB0: D2.14 VD18.2 X2.8 | length 10.1
  Top Layer w0.2: D2.14 17.635,26.15 18.635,25.15 22.407,25.15 22.656,25.399 VD18.2 X2.8
PB1: D2.15 VD19.2 X2.7 | length 10.2
  Top Layer w0.2: D2.15 21.456,26.65 22.281,27.475 22.656,27.85 VD19.2 X2.7
PB2: D2.16 VD20.2 X2.6 | length 11
  Top Layer w0.2: D2.16 19.356,27.15 22.657,30.451 22.657,31.114 22.658,31.115 X2.6
PB3: D2.26 VD11.2 X4.8 | length 9.4
  Top Layer w0.2: X4.8 VD11.2 4.21,26.4 4.46,26.65 D2.26
PB4: D2.27 VD10.2 X4.9 | length 10.3
  Top Layer w0.2: X4.9 VD10.2 4.2,23.887 4.463,24.15 6.962,24.15 8.962,26.15 D2.27
PB5: D2.28 VD9.2 X4.10 | length 11.2
  Top Layer w0.2: X4.10 VD9.2 4.2,21.508 4.317,21.625 5.035,21.625 9.06,25.65 D2.28
PB6: D2.29 VD8.2 X5.1 | length 16.3
  Top Layer w0.2: X5.1 VD8.2 4.2,16.498 4.327,16.625 5.96,16.625 6.185,16.85 6.185,22.123 9.212,25.15 D2.29
PB7: D2.30 VD7.2 X5.2 | length 18.3
  Top Layer w0.2: X5.2 3.67,13.335 4.21,13.875 VD7.2 4.21,14.606 4.327,14.723 6.618,14.723 6.735,14.84 6.735,21.985 9.4,24.65 D2.30
PB8: D2.32 VD6.2 X5.3 | length 19.5
  Top Layer w0.2: X5.3 3.234,10.795 4.21,11.771 VD6.2 4.21,13.004 4.327,13.121 7.046,13.121 7.985,14.06 7.985,21.7 9.935,23.65 D2.32
RESET: C12.2 D2.4 D3.6 R3.1 SB2.2 VT1.1 X3.5 | length 38.4
  Top Layer w0.2: D2.4 13.085,21.51 13.185,21.41 v2(13.185,21.275) ; D3.6 13.535,13.612 v2(13.898,13.975) 18.731,13.975 20.135,12.571 20.135,11.425 21.385,10.175 21.385,9.064 22.06,8.389 22.06,7.165 ; VT1.1 20.46,8.795 20.435,8.77 19.64,8.77 R3.1 C12.2 20.635,7.915 21.385,7.165 22.06,7.165 ; SB2.2@22.06,0.975 22.06,5.375 22.06,7.165 ; X3.5 23.315,7.165 22.06,7.165
  Bottom Layer w0.2: v2(13.185,21.275) 13.284,21.275 14.735,19.824 14.735,14.812 v2(13.898,13.975)
USER-BUTTON: C13.2 R7.1 R9.2 SB3.2 | length 7.3
  Top Layer w0.2: SB3.2@4.61,0.975 4.61,5.375 R9.2 R7.1
VDD-DIGITAL: C2.2 C3.2 C10.2 D1.2 L1.2 R3.2 R4.2 R7.2 SB1.2 X1.1 X4.2 | length 73.4
  Top Layer w0.2: SB1.2 18.274,9.526 18.285,9.515 R4.2 R3.2
  Top Layer w0.3: C2.2 11.188,36.425 D1.2
  Top Layer w0.4: R7.2 v2(5.61,8.965)
  Top Layer w0.5: X4.2 8.804,41.275 11.076,39.003 v2(11.076,37.575) C2.2 ; v2(8.212,7.893) 8.212,3.791 8.778,3.225 9.435,3.225 C10.2 9.485,1.944 9.778,1.651 X1.1 ; v2(8.685,19.9) 8.723,19.938 9.492,19.938 9.785,20.231 C3.2 L1.2 ; SB1.2 17.14,9.531 17.14,10.61 v2(17.145,10.615)
  Bottom Layer w0.5: v2(11.076,37.575) 7.785,34.284 7.785,20.8 v2(8.685,19.9) 8.685,18.603 6.535,16.453 6.535,9.89 v2(5.61,8.965) 6.682,7.893 v2(8.212,7.893) 14.423,7.893 v2(17.145,10.615)
VDD-IN: C1.2 D1.3 R1.2 X2.2 | length 13.5
  Top Layer w0.3: D1.3 13.26,36.425 13.404,36.569 13.966,36.569 C1.2@13.997,36.6
  Top Layer w0.6: C1.2@14.022,36.625 R1.2 17.035,36.625 21.685,41.275 X2.2
VDD-MCU: C4.2 C5.2 C6.2 D2.1 D2.17 L1.1 L2.2 | length 23
  Top Layer w0.3: C5.2 D2.1 ; D2.17 15.085,29.05 C4.2 15.635,28.6 v2(15.635,28.575)
  Top Layer w0.5: v2(10.685,22.475) L1.1 C5.2 ; v2(13.935,16.6) 13.935,16.8 C6.2 L2.2
  Bottom Layer w0.4: v2(10.685,22.475) 10.685,26.195 13.065,28.575 v2(15.635,28.575)
  Bottom Layer w0.5: v2(10.685,22.475) 10.685,19.85 v2(13.935,16.6)
pads on no net: X1.6 X1.7 X1.8

## Polygon pours and split planes (outlines as drawn)
GND on Bottom Layer "GND_L02_P001" (solid, remove dead copper, pour order 1): 0,49.53 0,0 26.67,0 26.67,49.53
GND on Top Layer "GND_L01_P000" (solid, remove dead copper, pour order 0): 0,49.53 0,0 26.67,0 26.67,49.53

## Keep-outs
Keep-Out Layer:
  the board outline again, w0.1

## Silkscreen, mask and mechanical layers (free items; w line width, h text height)
Top Overlay:
  text "Azek Clark" at 7.502,38.903 h2.5
  text "h" at 8.32,37.857 h15
  text "'.ProjectNumber'" at 6.413,31.549 h2
  text "USER" at 8.812,2.088 h2 r90
  text "RESET" at 18.812,1.888 h2 r90
Bottom Overlay:
  lines w0.2: 17.03,27.671 ccw(c17.03,27.171) 16.53,27.171 16.53,16.171 ccw(c17.03,16.171) 17.03,15.671 17.83,15.671 ccw(c17.83,16.171) 18.33,16.171 18.33,27.171 ccw(c17.83,27.171) 17.83,27.671 17.03,27.671 ; 17.03,27.671 17.03,27.671
  text "GND" at 6.462,43.288 h2
  text "GND" at 23.495,43.288 h2
  text "VDD" at 5.727,40.748 h2
  text "VIN" at 23.495,40.748 h2
  text "PA11" at 6.149,38.208 h2
  text "PA10" at 23.495,38.208 h2
  text "PA11" at 6.149,35.668 h2
  text "PA9" at 23.495,35.668 h2
  text "PA13" at 6.319,33.128 h2
  text "PA8" at 23.495,33.128 h2
  text "PA14" at 6.319,30.588 h2
  text "PB2" at 23.495,30.588 h2
  text "e" at 18.736,28.575 h15
  text "PA15" at 6.314,28.048 h2
  text "PB1" at 23.495,28.048 h2
  text "REV:" at 17.83,27.171 h1.5 r90
  text "PB3" at 6.314,25.508 h2
  text "PB0" at 23.495,25.508 h2
  text "'.ProjectDateShort' '.ProjectVersion'" at 17.819,24.671 h1.5 r90
  text "PB4" at 5.665,22.968 h2
  text "PA7" at 23.495,22.968 h2
  text "PB5" at 5.66,20.428 h2
  text "PA6" at 23.495,20.428 h2
  text "PA5" at 23.495,15.391 h2
  text "PB6" at 5.66,15.348 h2
  text "PB7" at 5.714,12.808 h2
  text "PA4" at 23.495,12.808 h2
  text "PB8" at 5.714,10.268 h2
  text "PA3" at 23.495,10.268 h2
  text "PA2" at 23.495,7.728 h2
  text "PA1" at 5.667,7.638 h2
  text "PA0" at 5.74,5.188 h2
  text "RESET" at 23.495,5.188 h2
Board Shape:
  the board outline again, w0.1